# Altium PCB PIAR_MainBoard.PcbDoc (part 3 of 3)
Units mil, origin at the board's own origin, x right, y up, seen from the top; angles counter-clockwise.
Board outline 3543.31 x 2165.35 mil, 2 copper layers (Top Layer, Bottom Layer), stack 61.811 mil thick; 79 components, 51 nets, 291 pads, 72 vias.
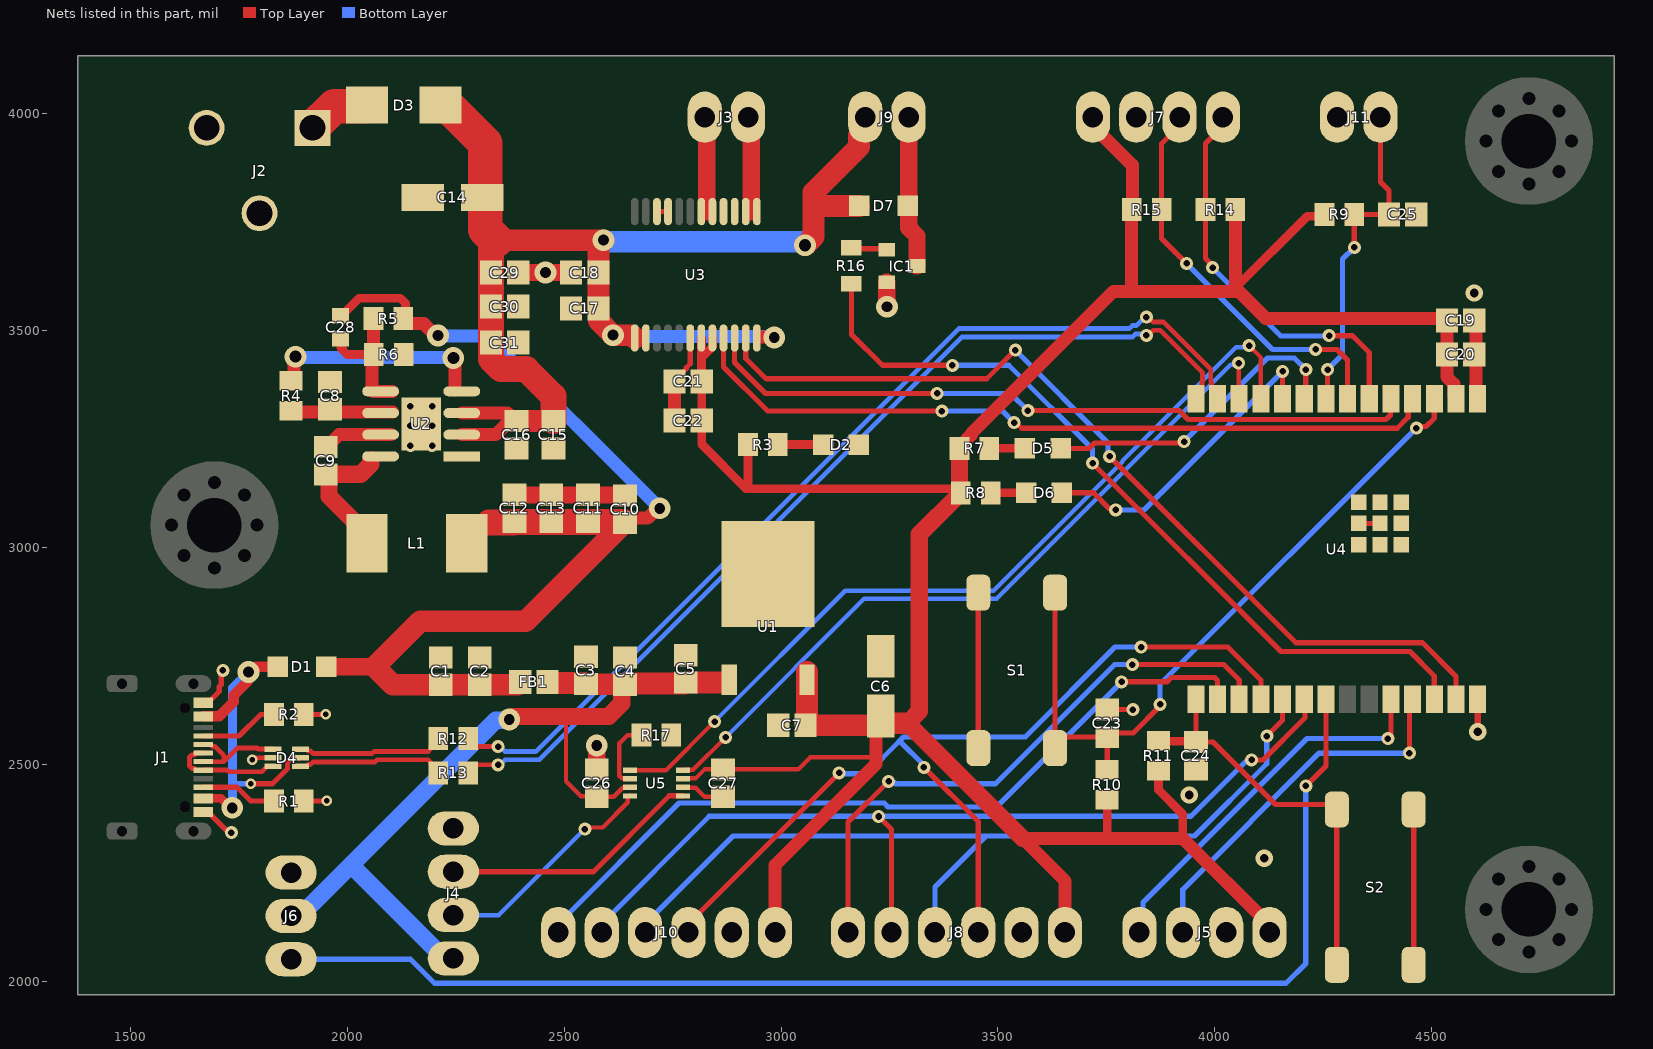
[diagram p2: the nets of this part, all layers, seen from the top]

## Part data (continued)
S1 S2: "SWITCH TACTILE SPST-NO 0.05A 24V", Contact Rating @ Voltage="0.05A @ 24VDC", Manufacturer="TE Connectivity ALCOSWITCH Switches", Operating Force=260gf, Operating Temperature="-40°C ~ 105°C", Supplier Part Number 1=450-2138-1-ND, Actuator Height off PCB, Vertical=7.00mm, Actuator Orientation="Top Actuated", Actuator Type=Standard, Circuit=SPST-NO, ComponentLink1Description=Datasheet, ComponentLink1URL=https://www.te.com/commerce/DocumentDelivery/DDEController?Action=srchrtrv&DocNm=1308111-1_SWITCHES_CORE_PROGRAM_CATALOG&DocType=CS&DocLang=English, ComponentLink2Description="DigiKey Link", ComponentLink2URL=https://www.digikey.com/en/products/detail/te-connectivity-alcoswitch-switches/FSM6JSMAASTR/5343804, Illumination=Non-Illuminated, lastupdated="03/06/2024 20:19:31", Lifecycle Status=Active, Minimum Order=1, Mounting Type="Surface Mount", Outline="6.00mm x 6.00mm", Packaging=TapeAndReel, Part Number=FSM6JSMAASTR, Part Status=Active, price=0.30, Series=FSMJSMA, Supplier 1=DigiKey, Switch Function=Off-Mom, Termination Style="Gull Wing"
U1: library part CMP-0244-00130-1, "1.5A, Very-Low Drop Voltage Regulator, 3.3V, 3-Pin DPAK", ComponentLink1Description="Manufacturer URL", ComponentLink1URL=http://www.st.com, ComponentLink2Description=Datasheet, ComponentLink2URL=http://www.st.com/internet/com/TECHNICAL_RESOURCES/TECHNICAL_LITERATURE/DATASHEET/CD00003403.pdf, DatasheetVersion=27/10/2010, PackageDescription="3-Pin Transistor Outline Package 2.28 mm Pitch, 9.7 mm Lead Span (DPAK)", PackageReference=TO-252, PackageVersion=2011
U2: library part CMP-04918-000184-1, "IC REG BUCK ADJUSTABLE 3A 8SOPWR", Max Input Voltage=36V, Max Operating Temperature=125°C, Max Output Voltage=24V, Min Input Voltage=3.8V, Min Operating Temperature=-40°C, Min Output Voltage=1V, Output Current=3A, Switching Frequency=400kHz, Mount="Surface Mount", Number of Outputs=1, Number of Pins=8, Output Configuration=Positive, Output Type=Adjustable, Packaging="Cut Tape", RoHS Compliant=Yes, Synchronous Rectifier=Yes
U3: library part CMP-1773-00001-1, "Driver IC for Dual DC Motor, 15 V, -20 to 85 degC, 24-Pin SSOP, RoHS, Tape and Reel", Case\Package=TO-236-3, Forward Current="70 mA", Forward Voltage="1 V", Max Operating Temperature="125 degC", Max Power Dissipation="200 mW", Max Surge Current="100 mA", Min Operating Temperature="-55 degC", Package Quantity=3000, Peak Reverse Current="0.1 uA", ComponentLink1Description="Manufacturer URL", ComponentLink1URL=http://www.toshiba.com/, ComponentLink2Description=Datasheet, ComponentLink2URL=https://toshiba.semicon-storage.com/info/docget.jsp?did=10660&prodName=TB6612FNG, DatasheetVersion=Oct-14, Element Configuration="Common Cathode", Elements=2, Height="1.1 mm", Length="3 mm", Mount="Surface Mount", PackageDescription="24-Pin Shrink Small Outline Package Integrated Circuit, Body 7.8 x 5.6 mm, Pitch 0.65 mm", PackageReference=SSOP-24, Packaging="Tape and Reel", Pins=3, Radiation Hardening=No, REACH SVHC="No SVHC", Recovery Time="5 ns", RoHSCompliant=true, Width="1.4 mm"
U5: library part CMP-0859-00001-2, "IC TRNSLTR BIDIRECTIONAL US8", Ambient Temperature Range High=+85°C, Ambient Temperature Range Low=-40°C, Manufacturer="Texas Instruments", Max Junction Temp=+150°C, Max Supply Voltage=5.5V, Min Supply Voltage=1.65V, Nominal Supply Current=1-14.4uA, Package=DCU0008A, Temperature="-40°C to +85°C", Automotive=No, Category=IC, ComponentLink2Description=Datasheet, ComponentLink2URL=http://www.ti.com/lit/ds/symlink/txs0102.pdf, Data Rate=24Mbits/s, Device Class L1="Integrated Circuits (ICs)", Device Class L2="Logic ICs", Device Class L3="Voltage Level Shifters", Digikey Description="IC TRNSLTR BIDIRECTIONAL US8", Height=0.9mm, Lead Free=Yes, Logic Function Desc="Bidirectional Voltage-Level Translator", Manufacturer Part Number=TXS0102DCUR, Mouser Description="Translation - Voltage Levels 2-Bit Bi-Directional Voltage-Level-Trans", Number of Circuits=1, Number Of Inputs=2, Number of Outputs=2, Octopart=https://octopart.com/txs0102dcur-texas+instruments-5414308, RoHS=TRUE, Standoff Height=0mm, Temperature Range High=+85°C, Temperature Range Low=-40°C, V A Max=3.6V, V A Min=1.65V, V B Max=5.5V, V B Min=2.3V

## Via types
v1: diameter 30, hole 15, Top Layer to Bottom Layer, tented both sides, 50 vias
v2: diameter 50, hole 25, Top Layer to Bottom Layer, tented both sides, 11 vias
v3: diameter 24, hole 13, Top Layer to Bottom Layer, tented both sides, 4 vias
v4: diameter 40, hole 20, Top Layer to Bottom Layer, tented both sides, 4 vias
v5: diameter 50, hole 28, Top Layer to Bottom Layer, tented both sides, 3 vias

## Nets (pads, with @x,y where several pads share a name; then routed paths per layer and width w, separated by ;. In a path a pad name is that pad's centre, name@x,y a point inside that pad or via, vN(x,y) a via of type N, cw(c..) or ccw(c..) an arc to the next point about the centre after c; other vN are vias at no path point)
+3.3V: C6.1 C7.2 C19.1 C20.1 C21.2 C22.1 C27.2 J5.1 J7.1 J8.1 J10.1 R3.1 R7.1 R8.1 R9.2 R10.2 R11.2 R14.2 R15.2 U1.3 U3.19 U3.20 U4.2 U5.3 | length 7127.8
  Top Layer w10: U5.3@2773.62,2466.54 2774.53,2467.44 2802.83,2467.44 2823.58,2488.19 C27.2@2866.14,2488.19 3039.37,2488.19 3066.93,2515.75 3218.5,2515.75
  Top Layer w20: U3.19@2816.02,3483.07 2816.44,3482.66 2816.44,3437.54 ; U3.20@2841.61,3483.07 2841.61,3462.72 2816.44,3437.54 ; R3.1@2923.54,3237.2 2923.54,3139.88 2919.13,3135.47 ; R8.1@3414.37,3125.98 3401.73,3135.47 2919.13,3135.47 ; 3751.97,2328.74 R10.2@3751.97,2418.31 ; R11.2@3870.08,2485.24 3870.08,2440.94 3926.26,2384.76 3926.26,2328.74 ; 4047.4,3598.15 4213.08,3763.83 4236.38,3763.83 4249.02,3776.46 R9.2@4249.02,3779.53 ; J5.1@4126.38,2112.2 J5.1@4126.38,2128.62 ; 2816.44,3437.54 2816.44,3383.09 C21.2@2816.85,3382.68 C22.1@2816.85,3292.68 2816.85,3237.76 2919.13,3135.47
  Top Layer w30: J10.1@2986.22,2112.2 2986.22,2267.72 3218.5,2500 3218.5,2515.75 C6.1@3218.5,2590 ; R7.1@3411.38,3228.35 3411.38,3232.28 3438.7,3259.61 3438.7,3262.77 3766.49,3590.55 3810,3590.55 ; J8.1@3654.53,2112.2 3654.53,2231.3 3557.09,2328.74 3751.97,2328.74 3926.26,2328.74 J5.1@4126.38,2128.62 ; J7.1@3718.9,3992.13 3718.9,3972.44 3810,3881.34 3810,3780.24 R15.2@3808.5,3778.74 3808.5,3592.05 3810,3590.55 ; R10.2@3751.97,2418.31 R10.2@3753.18,2417.1 ; R14.2@4047.4,3778.74 4047.4,3598.15 4055,3590.55 ; U4.2@4556.3,3342.52 4551.61,3347.2 4551.61,3376.64 4535.3,3392.95 4535.3,3523.62 C19.1@4535.43,3523.62 4530.87,3528.19 4117.36,3528.19 4055,3590.55 ; 3810,3590.55 4055,3590.55
  Top Layer w40: C7.2@3051.5,2590 3051.5,2591.97 C7.2@3059.76,2600.24 ; C6.1@3218.5,2590 3230,2601.5 C6.1@3230,2611.1 ; R8.1@3411.38,3129.92 R7.1@3411.38,3228.35 ; R8.1@3414.37,3125.98 3414.37,3122.05 3411.73,3119.41 3407.8,3119.41 3318.9,3030.51 3318.9,2622.05 3291.34,2594.49 3557.09,2328.74
  Top Layer w50: C7.2@3056.5,2590 C6.1@3218.5,2590 ; C7.2@3059.76,2600.24 U1.3@3059.76,2694.65 U1.3@3059.76,2712.6 ; C6.1@3230,2601.5 3230,2600.98 3236.5,2594.49 3291.34,2594.49
+5V: C3.2 C4.2 C5.2 C26.1 FB1.2 J4.4 J6.2 U1.1 U5.7 | length 2063.3
  Top Layer w10: 2503.94,2610.24 2503.94,2460.63 2538.1,2426.47 2573.53,2426.47 C26.1@2574.8,2425.2 2613.9,2425.2 2634.65,2445.94 2650.67,2445.94 U5.7@2651.57,2446.85
  Top Layer w40: v2(2373.03,2603.35) 2375.74,2603.35 2382.63,2610.24 2503.94,2610.24 2602.36,2610.24 2632.44,2640.31 2632.44,2677.91 2638.03,2683.5 C4.2@2640,2683.5 ; FB1.2@2461.5,2690 FB1.2@2464,2687.5 ; C3.2@2547.5,2687.5 C3.2@2550,2685 C3.2@2550.75,2684.25 ; C4.2@2639.25,2684.25 C4.2@2640,2683.5 ; C4.2@2642.5,2686 C4.2@2640,2683.5 ; C5.2@2777.5,2686 C5.2@2780,2688.5
  Top Layer w50: FB1.2@2464,2687.5 C3.2@2547.5,2687.5 ; C3.2@2550.75,2684.25 C4.2@2639.25,2684.25 ; C4.2@2642.5,2686 C5.2@2777.5,2686 ; C5.2@2780,2688.5 2859.92,2688.5
  Bottom Layer w40: J6.2@1870.08,2150.2 1890.7,2150.2 2010.01,2269.51 ; J4.4@2244.09,2052.17 2223.48,2052.17 2010.01,2265.63 2010.01,2269.51 ; v2(2373.03,2603.35) 2371.12,2601.43 2341.93,2601.43 2010.01,2269.51
+5V_UNFILTERED: C1.2 C2.2 C10.2 C11.2 C12.2 C13.2 C28.2 D1.2 FB1.1 L1.2 R5.1 | length 2657.5
  Top Layer w20: C28.2@1984.25,3534.45 1986.22,3534.45 2026.57,3574.8 2122.05,3574.8 2133.86,3562.99 2133.86,3532.48 R5.1@2128.94,3527.56
  Top Layer w30: R5.1@2126.71,3525.33 R5.1@2128.94,3527.56 2128.94,3523.62 2136.57,3515.98 2176.02,3515.98 2203.5,3488.5 v2(2208.91,3488.5) ; C10.2@2640,3057.01 2650.59,3067.6 2692.19,3067.6 2714.59,3090 v2(2720,3090)
  Top Layer w40: D1.2@1951.3,2725 2063.23,2725 ; FB1.1@2392.91,2683.5 2398.5,2689.09 FB1.1@2398.5,2690 ; C10.2@2638.03,3057.01 C10.2@2640,3057.01
  Top Layer w50: L1.2@2275,3010 2275,3030 2297.5,3052.5 2321.38,3052.5 2326.79,3057.91 ; C12.2@2384.41,3057.91 C12.2@2385,3058.5 ; FB1.1@2392.91,2683.5 C2.2@2305,2683.5 C1.2@2215,2683.5 2104.72,2683.5 2063.23,2725 2168.23,2830 2411.02,2830 2638.03,3057.01 C10.2@2636.54,3058.5
  Top Layer w60: 2326.79,3057.91 C12.2@2384.41,3057.91 ; C12.2@2385,3058.5 C13.2@2470,3058.5 C11.2@2555,3058.5 C10.2@2636.54,3058.5
  Bottom Layer w30: v2(2208.91,3488.5) 2209.74,3487.68 2322.32,3487.68 v2(2720,3090)
+5V_USB_VIN: D1.1 D4.5 J1.A4_B9 J1.B4_A9 | length 833
  Top Layer w12: v3(1776.87,2454.93) 1827.37,2454.93 1861.87,2489.44 1861.87,2504.94 1871.84,2514.91 1891.6,2514.91 D4.5@1891.69,2515
  Top Layer w20: J1.B4_A9@1667.52,2421.26 1708.9,2421.26 1730.69,2399.47 v2(1734.47,2399.47) ; 1740.16,2660.21 1740.16,2661.42 ; v2(1771.73,2712.84) 1777.14,2712.84 v2@1789.31,2725
  Top Layer w24: J1.A4_B9@1667.52,2610.24 1704.32,2610.24 1738.22,2644.13 1738.22,2659.48 ; 1740.16,2661.42 1769.82,2691.08 v2@1769.82,2710.92 ; v2@1789.31,2725 D1.1@1838.7,2725
  Top Layer w40: v2@1769.82,2710.92 v2(1771.73,2712.84)
  Bottom Layer w12: 1737.2,2459.65 1741.92,2454.93 v3(1776.87,2454.93)
  Bottom Layer w20: v2(1734.47,2399.47) 1735,2400 1735,2676.11 v2(1771.73,2712.84)
+12V: C14.1 C15.2 C16.2 C17.1 C18.2 C29.2 C30.2 C31.2 D3.2 D7.2 J9.1 U2.2 U2.3 U3.13 U3.14 U3.24 | length 3147
  Top Layer w12: U3.13@2662.48,3483.07 U3.14@2688.07,3483.07
  Top Layer w30: U2.2@2263.57,3260 2341.57,3260 2362.47,3280.91 2379.41,3280.91 C16.2@2390,3291.5 2388.03,3291.5 2369.53,3310 U2.3@2263.57,3310 ; U3.24@2952.76,3485.74 2982.76,3485.74 v2(2984.25,3484.25)
  Top Layer w50: 2342.52,3708.66 v2(2590.55,3708.66) 2578.74,3696.85 2578.74,3635.83 C18.2@2578.74,3633.86 ; C16.2@2390,3291.5 C15.2@2475,3291.5 ; C18.2@2578.15,3633.27 C18.2@2578.74,3633.86 ; U3.13@2662.48,3483.07 2655.98,3489.57 v2(2612.32,3489.57) 2579.33,3522.56 2579.33,3550.59 C17.1@2578.74,3551.18 C18.2@2578.74,3633.86 ; v5(3055.12,3696.85) 3074.8,3716.54 3074.8,3787.4 ; D7.2@3179.92,3787.4 3074.8,3787.4 ; J9.1@3194.09,3992.13 3194.09,3964.66 3179.72,3950.29 3179.72,3923.82 3074.8,3818.9 3074.8,3787.4
  Top Layer w60: 2342.52,3708.66 2330.71,3696.85 C29.2@2330.71,3633.86 C30.2@2330.71,3555.12 C31.2@2330.71,3472.44 2330.71,3434.29 2354.05,3410.94 2412.77,3410.94 2475,3348.71 C15.2@2475,3291.5
  Top Layer w80: D3.2@2214.65,4020 2216.97,4017.68 2232.31,4017.68 2317.96,3932.03 2317.96,3733.22 2342.52,3708.66
  Bottom Layer w30: v2(2612.32,3489.57) 2614.98,3486.91 2981.59,3486.91 v2(2984.25,3484.25)
  Bottom Layer w50: v2(2590.55,3708.66) 2594.49,3704.72 3047.24,3704.72 v5(3055.12,3696.85)
ESP_BTN: C25.2 J11.2 R9.1 U4.8 | length 771.7
  Top Layer w12: U4.8@4254.31,3340.54 U4.8@4256.3,3342.52 4260,3346.22 v1(4260,3410) ; v1(4321.85,3691.93) R9.1@4321.85,3767.72 C25.2@4401.57,3767.72 4401.57,3822.83 4381.89,3842.52 J11.2@4381.89,3992.13
  Bottom Layer w12: v1@4257,3407 v1(4260,3410) 4294.78,3444.78 4294.78,3664.86 v1(4321.85,3691.93)
ESP_FSPICS2: J10.6 U4.16 | length 1828.8
  Top Layer w12: v1(3785,2690) 3889.57,2690 3899.57,2700 3999.27,2700 4006.3,2692.97 U4.16@4006.3,2649.61
  Bottom Layer w12: J10.6@2486.22,2112.2 2486.22,2131.89 2764.83,2410.5 3237.84,2410.5 3246.77,2401.57 3496.57,2401.57 v1(3785,2690)
ESP_FSPICS3: J8.6 U4.17 | length 1370.9
  Top Layer w12: J8.6@3154.53,2112.2 3154.53,2367.13 v1(3248.03,2460.63) ; v1(3810,2730) 4020.52,2730 4056.3,2694.22 U4.17@4056.3,2649.61
  Bottom Layer w12: v1(3248.03,2460.63) 3251.48,2457.19 3262.06,2457.19 3264.06,2455.19 3494.56,2455.19 3769.37,2730 v1(3810,2730)
ESP_I2C_SCL: J7.3 R15.1 U4.7 | length 931.6
  Top Layer w12: J7.3@3918.9,3992.13 3918.9,3972.44 3877.4,3930.94 R15.1@3877.4,3778.74 3877.4,3712.6 v1(3935,3655) ; v1(4232.28,3456.69) 4282.08,3456.69 4306.3,3432.47 U4.7@4306.3,3342.52
  Bottom Layer w12: v1(3935,3655) 4133.31,3456.69 v1(4232.28,3456.69)
ESP_I2C_SDA: J7.4 R14.1 U4.6 | length 920.4
  Top Layer w12: v1(3995,3645) 3995,3649.87 3978.5,3666.37 R14.1@3978.5,3778.74 3978.5,3931.7 4018.9,3972.09 J7.4@4018.9,3992.13 ; v1(4263.78,3488.19) 4317.74,3488.19 4356.3,3449.63 U4.6@4356.3,3342.52
  Bottom Layer w12: v1(3995,3645) 4152.31,3487.69 4263.28,3487.69 v1(4263.78,3488.19)
ESP_LED: J6.3 U4.21 | length 3010
  Top Layer w12: v1(4210,2450) 4256.3,2496.3 U4.21@4256.3,2649.61
  Bottom Layer w12: J6.3@1870.08,2050.2 2145.24,2050.2 2200.65,1994.8 4164.09,1994.8 4210,2040.71 v1(4210,2450)
ESP_LED_BLUE: D6.2 U4.10 | length 720.3
  Top Layer w12: D6.2@3647.64,3125.98 3720.47,3125.98 3756.4,3090.06 3768.21,3090.06 v1(3771.65,3086.61) ; U4.10@4156.3,3342.52 v1(4156.3,3405.69)
  Bottom Layer w12: v1(3771.65,3086.61) 3836.91,3086.61 4155.98,3405.69 v1(4156.3,3405.69)
ESP_LED_GREEN: D5.2 U4.9 | length 740.6
  Top Layer w12: D5.2@3644.65,3228.35 3709.86,3228.35 3722.53,3241.01 3926.15,3241.01 v1(3929.13,3244) ; U4.9@4200.05,3336.27 U4.9@4206.3,3342.52 4210,3346.22 v1(4210,3410)
  Bottom Layer w12: v1(3929.13,3244) 4121.83,3436.69 4183.31,3436.69 v1(4210,3410)
ESP_M1_IN1: U3.21 U4.4 | length 1761.1
  Top Layer w12: U3.21@2867.2,3483.07 2867.2,3416.26 2969.06,3314.41 v1(3370.79,3314.41) ; v1(3537.34,3287.64) 3542.21,3287.64 3554.85,3275 4420.67,3275 4445.93,3300.26 4445.93,3332.15 U4.4@4456.3,3342.52
  Bottom Layer w12: v1(3370.79,3314.41) 3510.54,3314.41 v1(3537.34,3287.64)
ESP_M1_IN2: U3.22 U4.5 | length 1681
  Top Layer w12: U3.22@2892.8,3483.07 2892.8,3426.1 2963.9,3355 v1(3360,3355) ; v1(3568.79,3315.47) 3918.11,3315.47 3938.58,3295 4395,3295 4405,3305 U4.5@4405,3341.22 ; U4.5@4394.15,3330.37 U4.5@4405,3341.22 ; U4.5@4406.3,3342.52 U4.5@4405,3341.22
  Bottom Layer w12: v1(3360,3355) 3529.27,3355 v1(3568.79,3315.47)
ESP_M1_PWM: U3.23 U4.27 | length 2112.7
  Top Layer w12: U3.23@2918.39,3483.07 2918.39,3435.95 2965.33,3389 3474,3389 v1(3540,3455) ; v1(3757.28,3210.01) 4187.29,2780 4478.86,2780 4556.3,2702.56 U4.27@4556.3,2649.61
  Bottom Layer w12: v1(3540,3455) 3753.83,3241.17 3753.83,3213.46 v1(3757.28,3210.01)
ESP_RST: C23.2 R10.1 S1.3 S1.4 U4.3 | length 1695.8
  Top Layer w12: S1.3@3631.89,2537.4 S1.3@3631.89,2542.03 ; S1.4@3631.89,2895.67 S1.3@3631.89,2542.03 ; R10.1@3751.97,2487.2 C23.2@3751.97,2562.99 ; v1(3874.02,2637.8) 3874.02,2634.28 3811.87,2572.13 3761.11,2572.13 C23.2@3751.97,2562.99 ; v1(4464.83,3275.32) 4468.28,3278.77 4487.43,3278.77 4506.3,3297.64 U4.3@4506.3,3342.52 ; S1.3@3631.89,2542.03 3652.86,2562.99 C23.2@3751.97,2562.99
  Bottom Layer w12: v1(3874.02,2637.8) 3874.02,2684.51 v1(4464.83,3275.32)
ESP_SPI_CLK: J8.3 J10.3 U4.18 | length 2196.6
  Top Layer w12: J10.3@2786.22,2112.2 2786.22,2132.28 3133.86,2479.92 v1(3133.86,2480.32) ; v1(3329.38,2492.81) 3329.64,2492.81 3454.53,2367.91 J8.3@3454.53,2112.2 ; v1(3830.12,2770.24) 4029.76,2770.24 4106.3,2693.7 U4.18@4106.3,2649.61
  Bottom Layer w12: v1(3133.86,2480.32) 3135.97,2478.2 3197.69,2478.2 3272.42,2552.94 ; 3282.48,2562.99 3273.27,2553.78 3329.38,2497.68 v1(3329.38,2492.81) ; 3283.68,2562.99 3562.99,2562.99 3770.24,2770.24 v1(3830.12,2770.24)
ESP_SPI_MISO: J8.4 J10.4 U4.19 | length 2041.2
  Top Layer w12: v1(4120,2565) 4156.3,2601.3 U4.19@4156.3,2649.61
  Bottom Layer w12: J10.4@2686.22,2112.2 2686.22,2131.89 2888.98,2334.65 3472.44,2334.65 ; J8.4@3354.53,2112.2 3354.53,2216.73 3472.44,2334.65 ; v1(4120,2565) 4120,2501.16 3953.49,2334.65 3472.44,2334.65
ESP_SPI_MOSI: J8.5 J10.5 U4.20 | length 2161.1
  Top Layer w12: v1(3225,2379.5) 3254.53,2349.97 J8.5@3254.53,2112.2 ; v1(4085,2510) 4110.94,2510 4208.08,2607.14 4208.08,2647.82 U4.20@4206.3,2649.61
  Bottom Layer w12: J10.5@2586.22,2112.2 2586.22,2131.89 2834.33,2380 3225,2380 3945,2380 4071.56,2506.56 4081.56,2506.56 v1(4085,2510)
ESP_UART_RX: J5.4 U4.24 | length 886.9
  Top Layer w12: v1(4399.24,2559.16) 4399.24,2564.03 4406.3,2571.08 U4.24@4406.3,2649.61
  Bottom Layer w12: J5.4@3826.38,2112.2 3834.47,2120.3 3834.47,2180.93 4212.7,2559.16 v1(4399.24,2559.16)
ESP_UART_TX: J5.3 U4.25 | length 878.8
  Top Layer w12: v1(4448.71,2525.56) 4448.71,2642.01 U4.25@4456.3,2649.61
  Bottom Layer w12: J5.3@3926.38,2112.2 3926.38,2211.38 4240.56,2525.56 v1(4448.71,2525.56)
ESP_USONIC_ECHO: U4.12 U5.4 | length 1753.6
  Top Layer w10: U5.4@2773.62,2486.22 2774.53,2487.13 2797.06,2487.13 v1(2871.84,2561.9) ; v1(4055.12,3425.2) 4055.12,3343.7 U4.12@4056.3,3342.52
  Bottom Layer w10: v1(2871.84,2561.9) 3191.86,2881.92 3497.07,2881.92 4036.52,3421.37 4051.29,3421.37 v1(4055.12,3425.2)
ESP_USONIC_TRIG: U4.11 U5.5 | length 1968.5
  Top Layer w10: U5.5@2651.57,2486.22 2734.25,2486.22 v1(2846.46,2598.43) ; v1(4078.99,3465.43) 4106.3,3438.12 U4.11@4106.3,3342.52
  Bottom Layer w10: v1(2846.46,2598.43) 3147.95,2899.92 3489.61,2899.92 3787.28,3197.59 3787.28,3199.78 4049.1,3461.6 4075.16,3461.6 v1(4078.99,3465.43)
ESP_VALVE_PIN: R16.1 U4.26 | length 1860.2
  Top Layer w12: R16.1@3162.2,3608.11 3162.2,3491.34 3233.54,3420 v1(3395,3420) ; v1(3718.4,3194.13) 4152.53,2760 4450,2760 4506.3,2703.7 U4.26@4506.3,2649.61
  Bottom Layer w12: v1(3395,3420) 3525,3420 3717.87,3227.13 3717.87,3194.66 v1(3718.4,3194.13)
GND: C1.1 C2.1 C3.1 C4.1 C5.1 C6.2 C7.1 C8.1 C10.1 C11.1 C12.1 C13.1 C14.2 C15.1 C16.1 C17.2 C18.1 C19.2 C20.2 C21.1 C22.2 C23.1 C24.1 C25.1 C26.2 C27.1 C29.1 C30.1 C31.1 D2.2 D4.2 IC1.2 J1.A1_B12 J1.B1_A12 J2.2 J2.3 J4.1 J5.2 J6.1 J7.2 J8.2 J10.2 J11.1 R1.1 R2.1 R6.1 R17.1 S1.1 S1.2 S2.3 S2.4 U1.4 U2.1 U2.9 U3.3 U3.4 U3.9 U3.10 U3.18 U4.1 U4.28 U4.29 U5.2 | length 2244.1
  Top Layer w10: U5.2@2773.62,2446.85 2783.46,2446.85 2784.37,2445.94 2802.83,2445.94 2823.58,2425.2 C27.1@2866.14,2425.2
  Top Layer w11.07: v3(1780,2510) 1783.5,2510 1788.5,2515 D4.2@1828.31,2515
  Top Layer w12: J1.B1_A12@1667.52,2389.76 1678.35,2389.76 1722.15,2345.96 1728.84,2345.96 v1(1732.28,2342.52) ; J1.A1_B12@1667.52,2641.73 1678.35,2641.73 1704.22,2667.61 1704.22,2679.29 1709.15,2684.22 1709.15,2713.09 v1(1712.6,2716.54) ; R1.1@1899.45,2415 1951.8,2415 v3(1952.39,2415.59) ; R2.1@1899.45,2615 v3(1950,2615) ; U3.10@2713.66,3774.41 U3.9@2739.25,3774.41 ; C21.1@2753.86,3382.68 2753.86,3384.65 2781.32,3412.11 2781.32,3414.35 2790.43,3423.46 U3.18@2790.43,3483.07 ; S1.1@3454.72,2537.4 S1.2@3454.72,2895.67 ; C23.1@3751.97,2625.98 v1(3811.02,2625.98) ; U4.29@4331.89,3055.32 U4.29@4381.1,3055.32 ; S2.3@4458.66,2037.4 S2.4@4458.66,2395.67
  Top Layer w15: v4(4606.3,2574.8) U4.28@4606.3,2649.61
  Top Layer w30: C22.2@2753.86,3292.68 C21.1@2753.86,3382.68 ; C19.2@4598.43,3523.62 4602.36,3519.68 4602.36,3346.46 U4.1@4606.3,3342.52
  Top Layer w40: C12.1@2385,3121.5 2385.75,3120.75 2639.25,3120.75 C10.1@2640,3120 ; C29.1@2393.7,3633.86 v2(2456.69,3633.86) C18.1@2515.75,3633.86 ; C26.2@2574.8,2488.19 v2(2574.8,2543.31) ; IC1.2@3243.62,3611.42 3243.62,3555.59 v2(3244.09,3555.12)
  other v1: 2145,3235 2195,3235 2145,3280 2195,3280 2145,3325 2195,3325
  other v4: 4114.17,2283.46 3940.94,2429.13 4598.43,3586.61
NetC8_2: C8.2 R4.1 U2.6 | length 234.5
  Top Layer w30: R4.1@1870,3315.55 1872.78,3312.78 U2.6@2103.35,3312.78
NetC9_1: C9.1 L1.1 U2.8 | length 320.3
  Top Layer w40: C9.1@1950,3168.5 C9.1@1951.97,3168.5 ; L1.1@2045,3010 2045,3030 1957.56,3117.44 1957.56,3162.91 C9.1@1951.97,3168.5 ; U2.8@2054.05,3201.46 2054.05,3191.94 2030.62,3168.5 C9.1@1951.97,3168.5
NetC9_2: C9.2 U2.7 | length 161.8
  Top Layer w30: C9.2@1950,3231.5 1951.97,3231.5 1980.47,3260 U2.7@2076.43,3260 U2.7@2100,3260
NetC24_2: C24.2 R11.1 S2.1 S2.2 U4.15 | length 933.9
  Top Layer w12: C24.2@3956.5,2551.38 U4.15@3956.5,2649.41 ; C24.2@3956.69,2551.18 3996.06,2551.18 4139.84,2407.4 S2.2@4269.76,2407.4 ; S2.1@4281.5,2037.4 S2.2@4281.5,2395.67
  Top Layer w20: R11.1@3870.08,2554.13 3871.56,2552.66 3955.22,2552.66 C24.2@3956.5,2551.38 ; U4.15@3956.3,2649.61 U4.15@3956.5,2649.41 ; S2.2@4269.76,2407.4 S2.2@4281.5,2395.67 ; C24.2@3956.5,2551.38 C24.2@3956.69,2551.18 C24.2@3956.5,2551.38
NetC28_1: C28.1 R5.2 R6.2 U2.5 | length 324.3
  Top Layer w20: C28.1@1984.25,3481.3 1984.25,3460.53 1999.79,3445 R6.2@2060.3,3445
  Top Layer w30: C28.1@1984.25,3481.3 1986.22,3481.3 C28.1@1988.94,3478.58 ; R5.2@2060.04,3527.56 2060.3,3527.3 R6.2@2060.3,3445 ; U2.5@2104.33,3360 2060.28,3360 2056.73,3363.54 2056.73,3441.18 R6.2@2060.3,3444.74 ; R6.2@2060.3,3444.74 R6.2@2060.3,3445 ; R6.2@2060.3,3444.74 R6.2@2060.55,3445 R6.2@2060.3,3445
NetD2_1: D2.1 R3.2 | length 104.2
  Top Layer w20: R3.2@2992.44,3237.2 D2.1@3096.65,3237.2
NetD3_1: D3.1 J2.1 | length 147.8
  Top Layer w80: J2.1@1919.29,3967.52 1969.45,4017.68 2043.03,4017.68 D3.1@2045.35,4020
NetD5_1: D5.1 R7.2 | length 81.7
  Top Layer w20: R7.2@3480.28,3228.35 D5.1@3561.97,3228.35
NetD6_1: D6.1 R8.2 | length 81.7
  Top Layer w20: R8.2@3483.27,3125.98 D6.1@3564.96,3125.98
NetD7_1: D7.1 IC1.3 J9.2 | length 357.5
  Top Layer w40: J9.2@3289.68,3987.72 J9.2@3294.09,3992.13 3294.09,3737.4 3313.31,3718.19 IC1.3@3313.31,3648.82
NetIC1_1: IC1.1 R16.2 | length 83.3
  Top Layer w12: R16.2@3162.2,3690.79 3164.49,3688.5 3241.34,3688.5 IC1.1@3243.62,3686.22
NetJ1_A5: J1.A5 R2.2 | length 183.8
  Top Layer w12: J1.A5@1667.52,2564.96 1749.96,2564.96 1800,2615 R2.2@1830.55,2615
NetJ1_B5: J1.B5 R1.2 | length 176.2
  Top Layer w12: J1.B5@1667.52,2446.85 1745.08,2446.85 1776.93,2415 R1.2@1830.55,2415
NetJ3_1: J3.1 U3.5 U3.6 | length 246.8
  Top Layer w12: U3.6@2817.12,3775.5 U3.6@2816.02,3774.41 2828.82,3774.41 U3.5@2841.61,3774.41
  Top Layer w40: J3.1@2824.02,3992.13 2828.82,3987.32 2828.82,3774.41
NetJ3_2: J3.2 U3.1 U3.2 | length 246.3
  Top Layer w12: U3.2@2918.39,3774.41 2931.18,3774.41 U3.1@2943.98,3774.41
  Top Layer w40: J3.2@2924.02,3992.13 2931.18,3984.96 2931.18,3774.41
NetJ4_2: J4.2 U5.1 | length 602
  Top Layer w12: J4.2@2244.09,2252.17 2567.13,2252.17 2742.13,2427.17 U5.1@2773.62,2427.17
NetJ4_3: J4.3 U5.8 | length 529.7
  Top Layer w10: v1(2547.24,2350.39) 2551.07,2354.22 2588.47,2354.22 2646.37,2412.12 2646.37,2426.26 2647.28,2427.17 U5.8@2651.57,2427.17
  Bottom Layer w10: J4.3@2244.09,2152.17 2349.02,2152.17 v1(2547.24,2350.39)
NetR17_2: R17.2 U5.6 | length 161.4
  Top Layer w10: U5.6@2651.57,2466.54 2650.67,2467.44 2632.75,2467.44 2626.89,2473.3 2626.89,2548.15 2645.67,2566.93 R17.2@2678.15,2566.93
PG: R4.2 U2.4 | length 500.1
  Top Layer w30: R4.2@1870,3384.45 1876.17,3390.62 1876.17,3436.17 v5(1880,3440) ; v5(2244.09,3437.01) 2247.92,3433.18 U2.4@2247.92,3363.54
  Bottom Layer w30: v5(1880,3440) 1881.5,3438.5 2242.6,3438.5 v5(2244.09,3437.01)
USB_CONN_D_N: D4.1 J1.A7 J1.B7 | length 247.5
  Top Layer w11.07: J1.A7@1667.52,2505.91 1667.83,2505.6 1714.59,2505.6 ; J1.B7@1667.52,2545.28 1684.25,2545.28 1688.56,2540.97 1694.08,2540.97 1714.59,2520.46 1714.59,2505.6 ; D4.1@1828.31,2534.68 1827.93,2535.06 1793.88,2535.06 1791.4,2537.53 1746.53,2537.53 1714.59,2505.6
USB_CONN_D_P: D4.3 J1.A6 J1.B6 | length 260
  Top Layer w11.07: J1.A6@1667.52,2525.59 1650.79,2525.59 1646.48,2521.28 1640.96,2521.28 1635.41,2515.73 1635.41,2496.08 1640.96,2490.53 1646.48,2490.53 1650.79,2486.22 J1.B6@1667.52,2486.22 1667.83,2486.53 1722.49,2486.53 1726.55,2482.47 1801.88,2482.47 1814.72,2495.32 D4.3@1828.31,2495.32
USB_D_N: D4.6 R12.1 | length 340.1
  Top Layer w11.07: D4.6@1891.69,2534.68 1905.28,2534.68 1909.59,2530.38 1915.1,2530.38 1920.95,2524.53 2055.89,2524.53 2060.57,2529.22 2186.06,2529.22 2192.54,2535.7 2192.54,2541.95 R12.1@2209.65,2559.06
USB_D_P: D4.4 R13.1 | length 340.1
  Top Layer w11.07: D4.4@1891.69,2495.32 1905.28,2495.32 1909.59,2499.62 1915.1,2499.62 1920.95,2505.47 2063.79,2505.47 2068.47,2510.15 2186.06,2510.15 2192.54,2503.67 2192.54,2497.42 R13.1@2209.65,2480.32
USB_D_R_N: R12.2 U4.13 | length 2264.2
  Top Layer w11.07: R12.2@2278.54,2559.06 2296.91,2540.69 v1(2347.44,2540.69) ; v1(3842.52,3531.15) 3847,3531.15 3858.47,3519.68 3882.02,3519.68 3990.83,3410.87 3990.83,3382.64 3992.15,3381.33 3992.15,3356.67 U4.13@4006.3,3342.52
  Bottom Layer w11.07: v1(2347.44,2540.69) 2351.92,2540.69 2363.39,2529.22 2434.08,2529.22 3409.46,3504.6 3802.58,3504.6 3809.51,3511.53 3818.41,3511.53 3838.04,3531.15 v1(3842.52,3531.15)
USB_D_R_P: R13.2 U4.14 | length 2225.9
  Top Layer w11.07: R13.2@2278.54,2480.32 2296.91,2498.69 v1(2347.44,2498.69) ; v1(3842.52,3489.15) 3847,3489.15 3858.47,3500.62 3874.12,3500.62 3971.77,3402.97 3971.77,3382.64 3970.45,3381.33 3970.45,3356.67 U4.14@3956.3,3342.52
  Bottom Layer w11.07: v1(2347.44,2498.69) 2351.92,2498.69 2363.39,2510.15 2441.97,2510.15 3417.35,3485.53 3810.47,3485.53 3817.4,3492.46 3839.21,3492.46 v1(3842.52,3489.15)
pads on no net: J1. J1.A8 J1.B8 J1.SH1 J1.SH2 J1.SH3 J1.SH4 MH1.1 MH2.1 MH3.1 U3.7 U3.8 U3.11 U3.12 U3.15 U3.16 U3.17 U4.22 U4.23

## Polygon pours and split planes (outlines as drawn)
GND on Top Layer "GND_L01_P012" (solid, remove dead copper, pour order 12): 1397.64,1988.19 1397.64,4114.17 4901.57,4114.17 4901.57,1988.19
+12V on Top Layer "+12V_L01_P014" (solid, pour order 14): 2696.85,3515.75 2696.85,3448.82 2649.61,3448.82 2633.86,3464.57 2610.24,3464.57 2610.24,3511.81 2614.17,3515.75
+5V_UNFILTERED on Top Layer "+5V_UNFILTERED_L01_P001" (solid, pour order 1): 2225,3085 2225,2940 2325,2940 2325,3010 2345,3030 2680,3030 2680,3060 2675,3085
+12V on Top Layer "+12V_L01_P002" (solid, pour order 2): 2220,3325 2220,3250 2225,3245 2350,3245 2370,3265 2505,3265 2505,3325 2500,3330 2495,3325
NetC9_1 on Top Layer "NETC9_1_L01_P000" (solid, pour order 0): 1920,3195 2000,3195 2029.53,3218.5 2116.14,3218.5 2116.14,3134.84 2095,3110 2095,2940 2000,2940 1985,2955 1985,3055 1920,3120
GND on Bottom Layer "GND_L02_P013" (solid, pour order 13): 1397.64,1988.19 4901.57,1988.19 4901.57,4114.17 1397.64,4114.17

## Keep-outs
Top Layer:
  rectangle: 4645.67,2342.52 4921.26,3759.84
Bottom Layer:
  rectangle: 4645.67,2342.52 4921.26,3759.84

## Silkscreen, mask and mechanical layers (free items; w line width, h text height)
Top Overlay:
  text "I2C" at 3621.89,3878.11 h60 r90
  text "Btn" at 4192.76,3878.11 h60 r90
  text "Valve" at 3080.55,3848.58 h60 r90
  text "v1.0.0" at 1614,3336 h40 r90
  text "Power" at 2894.84,3294.45 h60
  text "L1" at 3313.09,3198.91 h40
  text "L2" at 3301.28,3104.43 h40
  text "Reset" at 3407.64,2978.5 h60
  text "Smart Water Dispenser project" at 1550,2720 h50 r90
  text "Boot" at 4234.41,2486.38 h60
  text "SPI2-CS2" at 2441.1,2254.09 h60
  text "SPI2-CS3" at 3100.55,2254.09 h60
  text "UART0" at 3779.68,2254.09 h60
  text "LED" at 1714.41,1994.25 h60 r90
Bottom Overlay:
  text "Designed by Piotr Patek" at 4837.6,3742.13 h40 r90
Mechanical 1:
  lines w4: 1377.95,4133.86 1377.95,1968.5 4921.26,1968.5 4921.26,4133.86 ; 1378.94,4133.86 4759.84,4133.86

## Text inside footprints (layer, text, board x,y; h text height)
J1: Mechanical 13 "PCB EDGE" at 1381.89,2303.15 h16 r270